# EAGLE board Hélice31 Architecture electronique (EAGLE 9.7.0)

Size 150.21 x 149.21 mm. Coordinates in mm from the lower left corner, seen from the top.
Outline: 0,0 150.21,0 150.21,149.21 0,149.21 0,0
Copper layers (1*16): Top 0.035mm / dielectric 1.5mm / Bottom 0.035mm
Design rules "default": minimum track width 6mil, minimum drill 0.35mm, track to track 6mil, track to pad 6mil, pad to pad 6mil, via to via 6mil, smd to smd 6mil, copper to edge 40mil, drill to drill 6mil, minimum pad ring 10mil, minimum via ring 8mil, stop-mask expansion 4mil, vias tented up to drill 0mil, thermal gap 10mil

## Footprints (pad centres in the part's own frame; a part is rotated, then mirrored left to right if it is on the bottom)
BATTERY-GENERIC = drill 1.118 pad 3.15 octagon: + 2.54,0; - -2.54,0
HA-06-SM065 = drill 1 pad 1.676: 1 -2.54,-2.54; 2 0,2.54; 3 2.54,-2.54
SG90 = drill 1.016 long: 1 -2.54,0; 2 0,0; 3 2.54,0
SW-200D = drill 0.85 pad 1.45: 1 -7.15,0; 2 7.15,0
ARDUINO-UNO-R3-SHIELD = drill 1.016 pad 1.88: 3.3V 24.13,-2.54; 5V 24.13,0; A0 24.13,12.7; A1 24.13,15.24; A2 24.13,17.78; A3 24.13,20.32; A4 24.13,22.86; A5 24.13,25.4; AREF -24.13,-13.97; D2 -24.13,20.32; D3 -24.13,17.78; D4 -24.13,15.24; D5 -24.13,12.7; D6 -24.13,10.16; D7 -24.13,7.62; D8 -24.13,3.81; D9 -24.13,1.27; D10 -24.13,-1.27; D11 -24.13,-3.81; D12 -24.13,-6.35; D13 -24.13,-8.89; GND@0 24.13,2.54; GND@1 24.13,5.08; GND@2 -24.13,-11.43; IOREF 24.13,-7.62; NC 24.13,-10.16; RES 24.13,-5.08; RX -24.13,25.4; SCL -24.13,-19.05; SDA -24.13,-16.51; TX -24.13,22.86; VIN 24.13,7.62

## Placement (x,y rotation side)
BAT5  1.5V  [BATTERY-GENERIC]  34.57,53.14 270 top
BAT6  1.5V  [BATTERY-GENERIC]  34.65,31.63 270 top
RPOT1  250k  [HA-06-SM065]  88.58,122.35 0 top
SERVO1  SERVOSG90  [SG90]  143.23,21.76 90 top
SERVO2  SERVOSG90  [SG90]  143.18,49.96 90 top
TILT1  TILT  [SW-200D]  138.81,105.19 270 top
TILT2  TILT  [SW-200D]  143.03,105.18 270 top
TILT3  TILT  [SW-200D]  115.95,105.35 270 top
TILT4  TILT  [SW-200D]  119.81,105.48 270 top
TILT5  TILT  [SW-200D]  123.4,105.62 270 top
TILT6  TILT  [SW-200D]  127.4,105.76 270 top
TILT7  TILT  [SW-200D]  131.4,105.76 270 top
TILT8  TILT  [SW-200D]  134.84,105.35 270 top
TILT9  TILT  [SW-200D]  62.36,41.03 270 top
TILT10  TILT  [SW-200D]  66.65,41.08 270 top
TILT11  TILT  [SW-200D]  58.31,40.89 270 top
TILT12  TILT  [SW-200D]  71.05,41.28 270 top
TILT13  TILT  [SW-200D]  74.75,41.17 270 top
TILT29  TILT  [SW-200D]  58.38,11.14 270 top
TILT30  TILT  [SW-200D]  63,11.32 270 top
TILT31  TILT  [SW-200D]  67.7,11.5 270 top
TILT32  TILT  [SW-200D]  72.41,11.14 270 top
TILT33  TILT  [SW-200D]  76.66,11.05 270 top
U1  ARDUINO-UNO-R3-SHIELD  [ARDUINO-UNO-R3-SHIELD]  29.84,101.32 180 top

## Library data of the parts
BAT5 BAT6 RPOT1 SERVO1 SERVO2 TILT1-TILT13 TILT29-TILT33 U1 = Tinkercad

## Nets
BAT5+: BAT5.+ TILT12.1
BAT5-: BAT5.- TILT13.1
BAT6+: BAT6.+ TILT32.1
BAT6-: BAT6.- TILT33.1
SERVO1_GND: SERVO1.1 TILT31.2
SERVO1_PWR: SERVO1.2 TILT30.2
SERVO1_SIG: SERVO1.3 TILT29.2
SERVO2_GND: SERVO2.1 TILT10.2
SERVO2_PWR: SERVO2.2 TILT9.2
SERVO2_SIG: SERVO2.3 TILT11.2
U1_3.3V: RPOT1.1 TILT3.2 U1.3.3V
U1_A4: TILT6.2 U1.A4
U1_A5: TILT5.2 U1.A5
U1_D8: RPOT1.2 U1.D8
U1_D9: TILT11.1 U1.D9
U1_D10: TILT29.1 U1.D10
U1_GND: RPOT1.3 TILT4.2 TILT10.1 U1.GND@0 U1.GND@1 U1.GND@2

## Tracks (layer width: path | path; a pad name or v marks a point on that pad's centre or on a via)
BAT5+  (1 unrouted)
BAT5-  (1 unrouted)
BAT6+  (1 unrouted)
BAT6-  (1 unrouted)
SERVO1_GND  (1 unrouted)
SERVO1_PWR  (1 unrouted)
SERVO1_SIG  (1 unrouted)
SERVO2_GND  (1 unrouted)
SERVO2_PWR  (1 unrouted)
SERVO2_SIG  (1 unrouted)
U1_3.3V  (2 unrouted)
U1_A4  (1 unrouted)
U1_A5  (1 unrouted)
U1_D8  (1 unrouted)
U1_D9  (1 unrouted)
U1_D10  (1 unrouted)
U1_GND  (5 unrouted)